# Altium PCB PCB.PcbDoc (part 2 of 2)
Units mm, origin at the board's own origin, x right, y up, seen from the top; angles counter-clockwise.
Board outline 183.5 x 159 mm, 2 copper layers (Top Layer, Bottom Layer); 206 components, 135 nets, 566 pads, 103 vias.
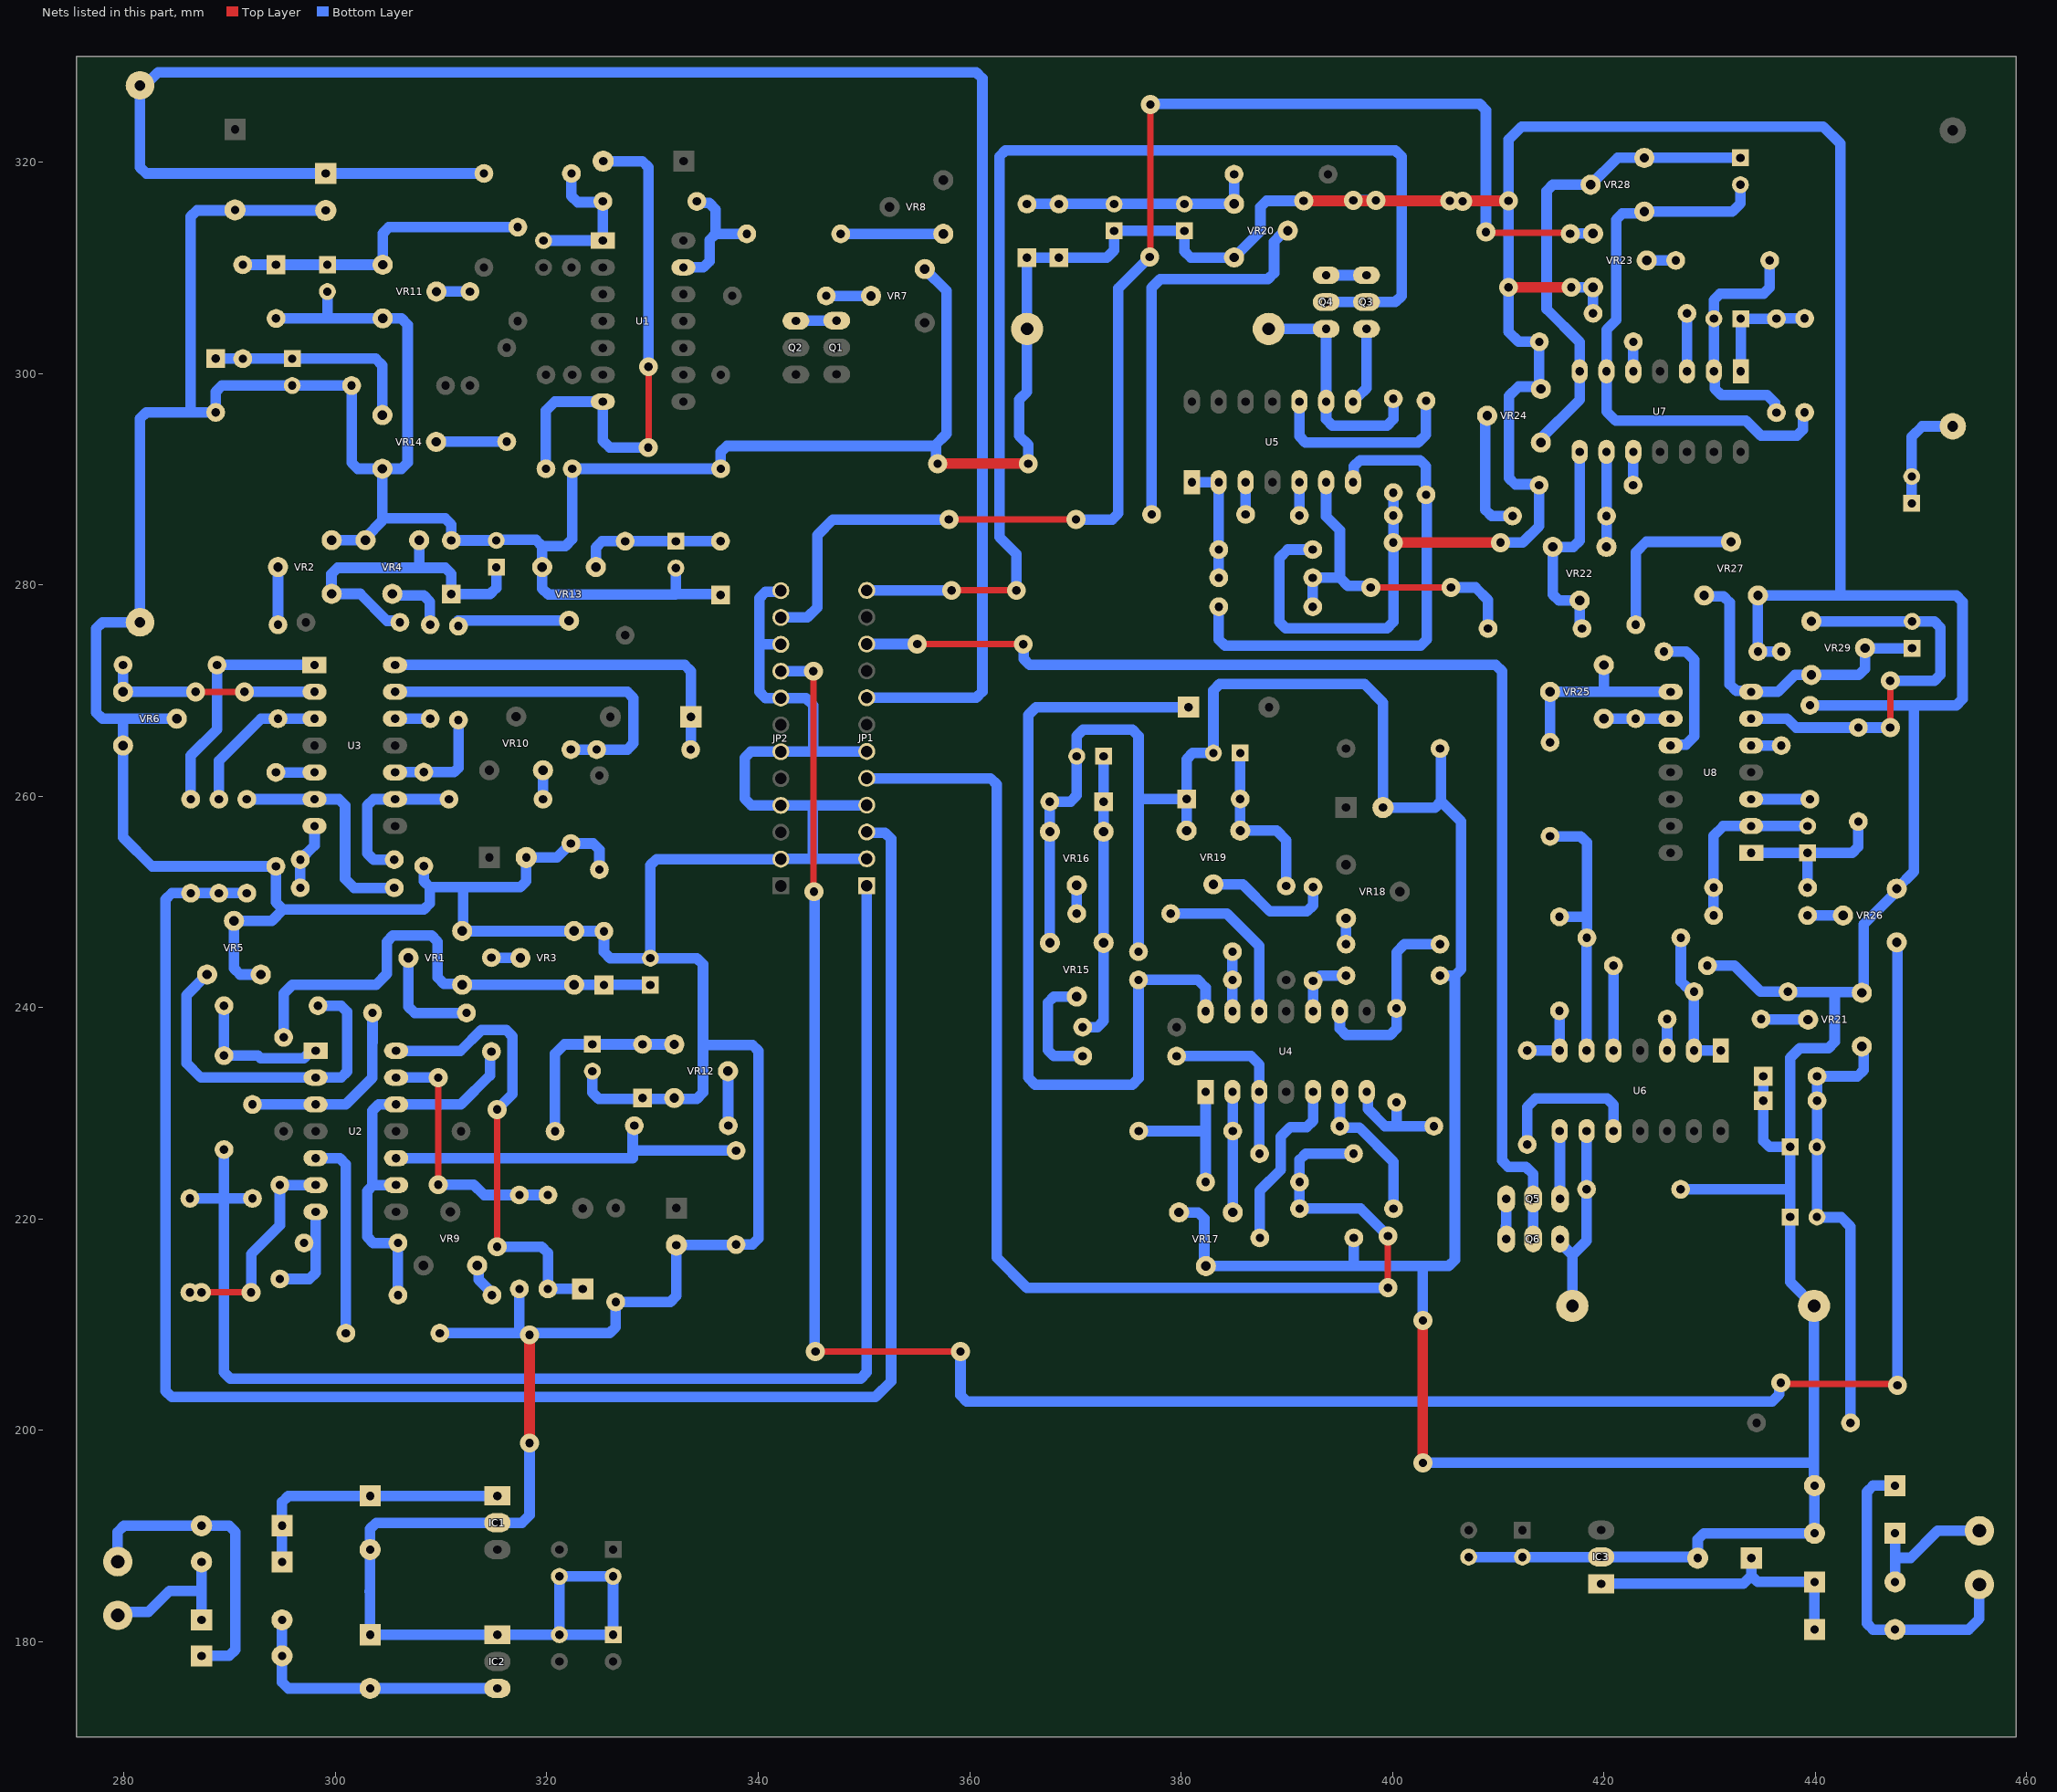
[diagram p2: the nets of this part, all layers, seen from the top]

## Via types
v1: diameter 1.8, hole 0.8, Top Layer to Bottom Layer, 103 vias

## Nets (pads, with @x,y where several pads share a name; then routed paths per layer and width w, separated by ;. In a path a pad name is that pad's centre, name@x,y a point inside that pad or via, vN(x,y) a via of type N, cw(c..) or ccw(c..) an arc to the next point about the centre after c; other vN are vias at no path point) (continued)
GND: C2.2 C3.2 C4.2 C5.2 C6.2 C7.2 C8.2 C9.2 C10.2 C11.2 C12.2 C13.2 C14.1 C15.1 C17.1 C18.1 C20.2 C21.2 C22.2 C23.1 C24.1 C25.1 C27.2 C28.2 C29.2 D1.1 D2.1 D4.1 D5.1 D6.2 D7.2 D8.1 D11.1 D12.2 D14.2 D15.2 D16.2 D17.2 D24.1 D25.1 IC1.2 IC2.1 IC3.2 JP1.2 JP1.4 JP1.6 JP2.2 JP2.4 JP2.6 JP2.8 JP2.10 JP2.12 R14.1 R17.1 R26.1 R27.1 R30.1 R31.1 R32.1 R37.1 R38.1 R39.2 R47.1 R48.1 R61.1 R62.2 R65.1 R68.1 R69.2 R70.1 R73.1 R77.1 R78.1 R80.1 R82.1 R87.2 R88.2 R89.1 R94.1 R96.2 R97.2 R99.1 VR1.3 VR2.3 VR3.3 VR4.3 VR5.2 VR5.3 VR6.2 VR6.3 VR7.3 VR11.3 VR12.3 VR13.3 VR14.3 VR15.3 VR16.3 VR17.2 VR17.3 VR19.3 VR20.3 VR21.3 VR23.3 VR24.3 VR26.3 VR27.3 | length 1328.8
  Top Layer w1: v1(318.365,198.805) v1(318.365,209.041) ; v1(356.973,291.464) v1(365.539,291.464) ; v1(391.593,316.331) v1(410.973,316.331) ; v1(400.076,283.996) v1(410.211,283.996) ; v1(402.87,196.925) v1(402.87,210.387) ; v1(410.973,308.152) v1(416.917,308.152)
  Bottom Layer w1: VR6.2@284.989,267.334 279.909,267.334 ; D4.1@289.993,315.421 286.896,315.421 286.31,314.836 286.31,296.315 ; D4.1@290.546,315.421 C4.2@299.086,315.421 ; VR5.3@292.939,243.128 290.985,243.128 290.399,243.714 VR5.2@290.399,248.208 293.981,248.208 295.047,249.275 ; D5.1@294.387,305.205 299.429,305.205 ; C7.2@299.238,307.745 299.238,305.396 299.429,305.205 ; VR2.3@299.645,284.225 VR4.3@302.845,284.225 302.871,284.25 302.871,284.495 304.445,286.07 304.445,286.277 ; 303.217,184.756 303.281,184.692 ; R27.1@308.357,253.389 308.357,251.969 308.943,251.383 ; R31.1@309.881,209.193 317.247,209.193 ; R47.1@317.404,213.379 317.404,209.35 317.247,209.193 ; v1(318.365,198.805) 318.365,191.972 317.651,191.258 IC1.2@315.32,191.258 303.866,191.258 303.281,190.673 C20.2@303.281,188.718 303.281,184.692 ; C8.2@324.308,233.984 324.308,231.953 324.894,231.368 334.187,231.368 334.773,231.953 334.773,236.473 ; R38.1@324.969,253.059 324.969,254.937 324.383,255.523 R48.1@322.276,255.523 320.955,254.202 C6.2@318.055,254.202 318.055,251.969 317.469,251.383 312.065,251.383 ; C9.2@332.208,281.583 332.208,279.12 ; D7.2@336.424,279.043 336.348,279.12 332.208,279.12 ; JP2.10@342.139,274.37 340.164,274.37 340.107,274.312 ; JP2.12@342.139,279.45 342.024,279.335 340.693,279.335 340.107,278.749 340.107,274.312 ; JP1.2@350.267,254.075 350.254,254.062 345.162,254.062 ; JP1.4@350.267,259.155 350.254,259.142 345.289,259.142 ; JP1.6@350.267,264.235 350.254,264.222 345.212,264.222 ; VR7.3@355.753,309.879 357.806,307.826 357.806,294.278 356.668,293.14 ; v1(356.973,291.464) 356.82,291.617 356.82,292.989 356.668,293.14 ; v1(365.539,291.464) 365.539,293.235 364.677,294.097 364.677,297.512 365.431,298.265 R82.1@365.431,304.215 D14.2@365.431,310.946 D15.2@368.453,310.946 372.975,310.946 373.66,311.632 C15.1@373.66,313.486 C14.1@380.315,313.486 380.315,311.557 380.901,310.971 VR20.3@385.014,310.971 387.503,313.46 387.503,315.745 388.089,316.331 v1(391.593,316.331) ; VR15.3@367.59,246.125 VR16.3@367.59,256.641 D11.1@367.59,259.485 369.544,259.485 370.13,260.071 C11.2@370.13,263.778 370.13,265.707 370.716,266.293 375.386,266.293 375.972,265.707 375.972,259.917 ; R77.1@375.972,245.287 375.972,259.917 ; VR17.3@379.807,220.623 381.604,220.623 382.19,220.038 382.19,215.701 VR17.2@382.347,215.543 396.292,215.543 ; VR19.3@380.518,256.742 D12.2@380.518,259.739 ; R70.1@392.456,283.336 390.094,283.336 389.307,282.549 389.307,276.48 389.893,275.894 399.491,275.894 400.076,276.48 R62.2@400.076,286.562 R73.1@400.076,288.721 ; v1(396.292,316.381) v1(398.425,316.381) ; R65.1@396.343,218.21 396.343,215.594 396.292,215.543 ; v1(402.87,196.925) 439.878,196.925 ; v1(402.87,210.387) 402.87,215.543 ; R61.1@404.496,243.026 R61.1@405.215,243.026 ; R68.1@404.496,264.515 404.598,264.413 404.598,259.512 ; R61.1@405.315,243.026 405.614,243.026 405.901,242.739 405.901,216.129 405.315,215.543 402.87,215.543 ; 405.755,243.026 405.899,243.026 406.485,243.612 406.485,257.625 404.598,259.512 ; C27.2@407.208,187.986 407.221,187.999 412.276,187.999 C29.2@412.288,188.012 412.295,188.018 419.737,188.018 IC3.2@419.743,188.024 428.76,188.024 C28.2@428.875,187.91 428.875,189.678 429.46,190.264 D24.1@439.924,190.264 D25.1@439.924,194.768 ; v1(410.211,283.996) 412.319,283.996 413.869,285.546 R94.1@413.869,289.432 413.791,289.51 411.61,289.51 411.024,290.095 411.024,297.865 411.913,298.754 413.869,298.754 413.881,298.766 413.881,302.983 R87.2@413.894,302.996 411.913,302.996 410.973,303.935 v1(410.973,308.152) 410.973,322.122 412.218,323.366 440.742,323.366 442.367,321.741 442.367,278.991 ; v1(416.917,308.152) VR23.3@418.974,308.152 R88.2@418.974,305.688 ; R80.1@427.254,222.806 437.541,222.806 437.618,222.73 ; R69.2@429.794,243.964 432.36,243.964 434.824,241.501 R78.1@437.414,241.501 437.465,241.45 441.834,241.45 ; VR27.3@434.57,278.991 R99.1@434.57,273.682 R96.2@436.779,273.682 ; D16.2@435.078,233.5 D17.2@435.078,231.188 435.078,227.405 435.663,226.819 C17.1@437.618,226.819 ; VR27.3@435.155,278.991 442.367,278.991 ; R97.2@439.497,268.602 449.327,268.602 ; D25.1@439.878,194.814 439.878,196.925 ; 279.909,267.334 277.955,267.334 277.369,267.92 277.369,275.867 277.955,276.453 R14.1@281.509,276.453 281.509,295.73 282.095,296.315 286.31,296.315 ; 279.909,267.334 VR6.3@279.909,264.794 279.909,256.107 282.652,253.364 R32.1@294.362,253.364 294.362,249.96 295.047,249.275 ; 286.31,296.315 D8.1@288.672,296.315 288.672,298.27 289.258,298.855 C10.2@295.911,298.855 R39.2@301.524,298.855 301.524,291.567 302.11,290.981 VR14.3@304.445,290.981 ; 295.047,249.275 308.357,249.275 308.943,249.86 308.943,251.383 ; 299.429,305.205 VR11.3@304.471,305.205 306.247,305.205 306.833,304.62 306.833,291.567 306.247,290.981 VR14.3@304.445,290.981 ; 303.281,184.692 C24.1@303.281,180.667 IC2.1@315.32,180.667 C23.1@321.188,180.667 ; 304.445,286.277 VR14.3@304.445,290.981 ; 304.445,286.277 310.387,286.277 310.973,285.692 D2.1@310.973,284.2 C3.2@315.215,284.2 315.266,284.25 318.973,284.25 319.558,283.665 ; 308.943,251.383 312.065,251.383 ; 312.065,251.383 312.065,247.319 VR1.3@311.989,247.243 312.002,247.23 325.388,247.23 D1.1@325.4,247.217 325.4,245.263 325.986,244.677 C2.2@329.795,244.677 ; 317.247,209.193 325.932,209.193 326.518,209.779 R37.1@326.518,212.14 331.673,212.14 332.258,212.726 C5.2@332.258,217.53 332.281,217.553 337.874,217.553 R26.1@337.897,217.575 339.445,217.575 340.031,218.161 340.031,235.887 339.445,236.473 334.773,236.473 ; 319.558,283.665 321.741,283.665 322.403,284.327 R17.1@322.403,290.981 R30.1@336.449,290.981 336.449,292.555 337.035,293.14 356.668,293.14 ; 319.558,283.665 VR13.3@319.558,281.685 319.558,279.655 320.144,279.069 332.157,279.069 332.208,279.12 ; C23.1@321.188,180.667 C25.1@326.268,180.667 C21.2@326.268,186.178 C22.2@321.188,186.178 C23.1@321.188,180.667 ; C2.2@329.795,244.677 334.187,244.677 334.773,244.091 334.773,236.473 ; C2.2@329.795,244.677 329.795,253.464 330.38,254.05 JP2.2@342.139,254.05 342.152,254.062 345.162,254.062 ; 340.107,274.312 340.107,269.876 340.693,269.29 JP2.8@342.139,269.29 344.527,269.29 345.212,268.604 345.212,264.222 ; 345.162,254.062 345.162,259.015 345.289,259.142 ; 345.212,264.222 342.152,264.222 JP2.6@342.139,264.21 339.296,264.21 338.71,263.624 338.71,259.765 339.345,259.13 JP2.4@342.139,259.13 342.152,259.142 345.289,259.142 ; 375.972,259.917 376.15,259.739 D12.2@380.518,259.739 ; D12.2@380.518,259.739 380.518,263.497 381.104,264.083 C13.2@383.058,264.083 383.058,270.025 383.644,270.611 397.352,270.611 399.106,268.856 C12.2@399.106,258.927 404.012,258.927 404.598,259.512 ; 396.292,215.543 402.87,215.543 ; 437.618,222.73 C18.1@437.618,220.19 437.618,214.043 R89.1@439.878,211.783 439.878,196.925 ; 437.618,222.73 C17.1@437.618,226.819 ; C17.1@437.618,226.819 437.618,235.252 438.532,236.167 441.248,236.167 441.834,236.752 441.834,241.45 ; 441.834,241.45 444.349,241.45 VR21.3@444.399,241.399 444.573,241.572 444.573,247.88 447.701,251.009 VR26.3@447.701,251.254 449.327,252.88 449.327,268.602 ; 442.367,278.991 453.339,278.991 453.924,278.405 453.924,269.188 453.339,268.602 449.327,268.602
  other v1: 406.63,316.28 405.436,316.331
h13: R8.2 R25.2 U1.13 | length 12.9
  Bottom Layer w1: U1.13@332.919,310.031 334.797,310.031 335.383,310.617 335.383,311.8 335.383,312.621 335.968,313.206 ; R8.2@334.189,316.28 334.338,316.131 335.347,316.131 335.968,315.509 335.968,313.206 ; R25.2@338.913,313.206 337.812,313.206 335.968,313.206
IPl: JP1.10 Q5.2 Q6.2 | length 117.9
  Top Layer w0.6: v1(355.041,274.395) 355.053,274.382 365.063,274.382 v1(365.075,274.37)
  Bottom Layer w1: JP1.10@350.267,274.395 v1(355.041,274.395) ; v1(365.075,274.37) 365.099,274.346 365.099,273 365.685,272.414 409.778,272.414 410.363,271.828 410.363,225.522 410.949,224.936 412.629,224.936 413.31,224.256 Q5.2@413.31,221.893 Q6.2@413.31,218.109
IPr: JP1.12 Q3.2 Q4.2 | length 115
  Top Layer w0.6: v1(358.293,279.475) v1(364.415,279.475)
  Bottom Layer w1: JP1.12@350.267,279.475 v1(358.293,279.475) ; v1(364.415,279.475) 364.415,282.904 362.807,284.512 362.807,320.52 363.393,321.106 400.278,321.106 400.864,320.52 400.864,307.341 400.278,306.755 Q4.2@393.726,306.755
KL-76: C4.1 JP1.8 R11.1 R14.2 | length 190.2
  Bottom Layer w1: R11.1@314.047,318.921 282.095,318.921 281.509,319.507 R14.2@281.509,327.253 281.969,327.253 283.214,328.497 360.621,328.497 361.207,327.911 361.207,269.901 360.621,269.315 JP1.8@350.267,269.315
NetC1_1: C1.1 R3.2 R8.1 U1.1 | length 14.7
  Bottom Layer w1: C1.1@319.685,312.571 U1.1@325.299,312.571 R8.1@325.299,316.28 325.223,316.204 322.913,316.204 322.327,316.789 R3.2@322.327,318.921
NetC2_1: C2.1 D1.2 R4.1 VR1.1 VR3.1 | length 46.8
  Bottom Layer w1: R4.1@295.098,237.184 295.098,241.348 295.92,242.17 303.853,242.17 304.877,243.194 304.877,243.832 304.857,243.852 304.857,246.225 305.442,246.811 309.092,246.811 309.678,246.225 309.678,242.839 310.264,242.253 311.899,242.253 VR1.1@311.989,242.163 312.002,242.15 329.782,242.15 C2.1@329.795,242.137
NetC3_1: C3.1 D2.2 R5.1 VR2.1 VR4.1 | length 32.3
  Bottom Layer w1: R5.1@306.096,276.453 305.948,276.601 304.881,276.601 302.337,279.145 VR2.1@299.645,279.145 299.619,279.17 299.619,281.023 300.205,281.609 307.925,281.609 ; VR4.1@307.925,284.225 307.925,281.609 ; C3.1@315.215,281.66 315.215,279.705 314.629,279.12 D2.2@310.973,279.12 310.973,281.023 310.387,281.609 307.925,281.609
NetC7_1: C7.1 D5.2 R29.1 R40.2 VR11.1 | length 29.2
  Bottom Layer w1: R40.2@291.237,310.285 D5.2@294.387,310.285 C7.1@299.238,310.285 VR11.1@304.471,310.285 304.471,313.256 305.057,313.841 R29.1@317.247,313.841
NetC8_1: C8.1 D6.1 R35.2 VR12.1 | length 19
  Bottom Layer w1: R35.2@320.778,228.294 320.778,235.633 321.668,236.524 C8.1@324.308,236.524 D6.1@329.058,236.524 VR12.1@332.055,236.524
NetC9_1: C9.1 D7.1 R36.2 VR13.1 | length 13.9
  Bottom Layer w1: VR13.1@324.638,281.685 324.638,283.538 325.224,284.123 R36.2@327.407,284.123 C9.1@332.208,284.123 D7.1@336.424,284.123
NetC10_1: C10.1 D8.2 R40.1 VR14.1 | length 20.7
  Bottom Layer w1: D8.2@288.672,301.395 R40.1@291.237,301.395 C10.1@295.911,301.395 303.81,301.395 304.445,300.76 VR14.1@304.445,296.061
NetC11_1: C11.1 D11.2 R51.1 VR15.1 VR16.1 | length 27.3
  Bottom Layer w1: R51.1@370.689,238.149 372.084,238.149 372.67,238.735 VR15.1@372.67,246.125 VR16.1@372.67,256.641 D11.2@372.67,259.485 C11.1@372.67,263.778
NetC13_1: C13.1 D12.1 R67.2 VR19.1 | length 16.4
  Bottom Layer w1: C13.1@385.598,264.083 D12.1@385.598,259.739 VR19.1@385.598,256.742 389.027,256.742 389.942,255.828 R67.2@389.942,251.51
NetC14_2: C14.2 C15.2 D14.1 D15.1 R76.1 VR20.1 | length 22.4
  Bottom Layer w1: D14.1@365.431,316.026 365.444,316.038 385.002,316.038 VR20.1@385.014,316.051 R76.1@385.014,318.845
NetC16_1: C16.1 R84.2 R86.2 U7.1 | length 11
  Bottom Layer w1: U7.1@432.944,300.202 C16.1@432.944,305.18 R84.2@436.322,305.18 436.335,305.193 438.977,305.193 R86.2@438.989,305.205
NetC16_2: C16.2 R84.1 R92.2 U7.2 | length 24
  Bottom Layer w1: R92.2@435.687,310.692 435.687,308.128 435.101,307.542 430.99,307.542 430.404,306.956 U7.2@430.404,300.202 430.504,300.101 430.504,298.544 431.09,297.959 435.441,297.959 436.173,297.226 436.173,296.439 R84.1@436.322,296.29
NetC17_2: C17.2 C18.2 D16.1 D17.1 R81.1 VR21.1 | length 42.4
  Bottom Layer w1: R81.1@443.333,200.71 443.333,219.277 442.458,220.152 440.195,220.152 C18.2@440.158,220.19 C17.2@440.158,226.819 D17.1@440.158,231.188 D16.1@440.158,233.5 443.987,233.5 444.573,234.085 444.573,236.146 VR21.1@444.399,236.319
NetC19_1: C19.1 R91.2 R93.2 U8.1 | length 16
  Bottom Layer w1: U8.1@433.935,254.632 C19.1@439.269,254.632 ; R91.2@439.269,251.356 C19.1@439.269,254.632 ; R93.2@444.069,257.604 444.069,255.218 443.483,254.632 C19.1@439.269,254.632
NetC19_2: C19.2 R91.1 R98.2 U8.2 | length 16.8
  Bottom Layer w1: R98.2@430.379,248.714 430.379,256.259 431.292,257.172 C19.2@439.269,257.172
NetC20_1: C20.1 D18.2 D19.2 IC1.1 | length 26.3
  Bottom Layer w1: D18.2@294.949,187.55 D19.2@294.949,190.979 294.949,193.213 295.535,193.798 C20.1@303.281,193.798 IC1.1@315.32,193.798
NetC24_2: C24.2 D20.1 D21.1 IC2.3 | length 26.5
  Bottom Layer w1: D20.1@294.949,182.064 D21.1@294.949,178.66 294.949,176.172 295.535,175.587 C24.2@303.281,175.587 IC2.3@315.32,175.587
NetC26_1: C26.1 U7.7 VR24.1 VR28.2 VR28.3 | length 46.1
  Bottom Layer w1: VR24.1@413.869,293.674 417.704,297.509 U7.7@417.704,300.202 417.704,302.97 414.58,306.094 414.58,317.269 415.166,317.855 VR28.2@418.745,317.855 421.285,320.395 C26.1@432.919,320.395
NetC26_2: C26.2 R86.1 U7.6 VR28.1 | length 54.2
  Bottom Layer w1: C26.2@432.919,317.855 432.919,316.078 432.155,315.315 VR28.1@423.825,315.315 423.652,315.141 421.747,315.141 421.161,314.556 421.161,305.063 420.244,304.145 U7.6@420.244,300.202 420.244,296.392 421.108,295.528 433.427,295.528 434.849,294.106 438.255,294.106 438.84,294.691 438.84,296.167 R86.1@438.989,296.315
NetC28_1: C28.1 D22.2 D23.2 IC3.1 | length 26.9
  Bottom Layer w1: IC3.1@419.743,185.484 433.195,185.484 433.955,186.244 ; C28.1@433.955,187.91 433.955,186.244 ; D23.2@439.924,181.154 D22.2@439.924,185.658 434.54,185.658 433.955,186.244
NetC30_1: C30.1 U8.7 VR27.1 VR29.2 VR29.3 | length 30.9
  Bottom Layer w1: VR27.1@429.49,278.991 429.562,278.919 431.317,278.919 431.903,278.333 431.903,270.592 432.522,269.973 433.834,269.973 U8.7@433.935,269.872 436.475,269.872 438.075,271.473 VR29.3@439.624,271.473 444.118,271.473 444.704,272.058 VR29.2@444.704,274.013 444.717,274 C30.1@449.162,274 C30.1@449.175,273.987
NetC30_2: C30.2 R93.1 U8.6 VR29.1 | length 39.8
  Top Layer w0.6: v1(447.089,266.494) v1(447.089,270.914)
  Bottom Layer w1: U8.6@433.935,267.332 437.338,267.332 438.176,266.494 R93.1@444.069,266.494 v1(447.089,266.494) ; VR29.1@439.624,276.553 439.631,276.546 449.156,276.546 C30.2@449.162,276.54 451.256,276.54 451.842,275.954 451.842,271.5 451.256,270.914 v1(447.089,270.914)
NetD3_1: D3.1 R24.1 U1.7 | length 50.8
  Top Layer w0.6: v1@329.617,292.759 v1(329.617,300.63)
  Bottom Layer w1: R24.1@319.914,290.981 319.914,296.493 320.752,297.331 U1.7@325.299,297.331 325.299,293.648 325.959,292.988 v1(329.591,292.988) ; D3.1@325.328,320.085 329.031,320.085 329.617,319.499 v1(329.617,300.63)
NetD18_1: D18.1 D20.2 HD1.2 | length 14.4
  Bottom Layer w1: HD1.2@279.405,182.495 279.736,182.827 282.302,182.827 284.294,184.819 287.317,184.819 287.329,184.807 ; D20.2@287.329,182.064 287.329,184.807 ; D18.1@287.329,187.55 287.329,184.807
NetD19_1: D19.1 D21.2 HD1.1 | length 29
  Bottom Layer w1: HD1.1@279.405,187.575 279.405,190.393 279.99,190.979 D19.1@287.329,190.979 289.944,190.979 290.53,190.393 290.53,179.246 289.944,178.66 D21.2@287.329,178.66
NetD22_1: D22.1 D24.2 HD2.2 | length 13.6
  Bottom Layer w1: D22.1@447.544,185.658 447.544,187.936 ; D24.2@447.544,190.264 447.544,187.936 ; HD2.2@455.519,190.501 451.582,190.501 449.017,187.936 447.544,187.936
NetD23_1: D23.1 D25.2 HD2.1 | length 29.9
  Bottom Layer w1: D25.2@447.544,194.768 445.462,194.768 444.877,194.182 444.877,181.74 445.462,181.154 454.503,181.154 455.519,182.17 HD2.1@455.519,185.421
NetQ1_1: Q1.1 Q2.3 | length 3.9
  Bottom Layer w1: Q2.3@343.561,304.977 343.574,304.989 347.41,304.989 Q1.1@347.422,305.002
NetQ3_1: Q3.1 Q4.3 | length 3.8
  Bottom Layer w1: Q4.3@393.726,309.295 Q3.1@397.536,309.295
NetQ5_1: Q5.1 Q6.3 | length 3.8
  Bottom Layer w1: Q6.3@410.721,219.29 Q6.3@410.732,219.3 ; Q6.3@410.77,218.109 Q5.1@410.77,221.893
NetR6_1: R6.1 R20.1 U2.6 | length 20.5
  Top Layer w0.6: R20.1@286.234,213.054 v1(292.025,213.054)
  Bottom Layer w1: v1(292.025,213.054) 292.025,216.67 294.743,219.388 R6.1@294.743,223.214 U2.6@298.121,223.214
  other v1: 287.326,213.054
NetR6_2: R6.2 R22.2 U2.7 | length 10.5
  Bottom Layer w1: R6.2@294.743,214.324 297.535,214.324 298.121,214.91 298.121,217.792 ; R22.2@297.029,217.728 297.093,217.792 298.121,217.792 ; U2.7@298.121,220.674 298.121,217.792
NetR7_1: R7.1 R21.1 U3.6 | length 21.5
  Bottom Layer w1: R21.1@291.618,259.714 U3.6@298.019,259.714 300.329,259.714 300.915,259.128 300.915,252.172 301.755,251.332 305.512,251.332 305.538,251.357 R7.1@305.563,251.332
NetR7_2: R7.2 R23.2 U3.7 | length 6.4
  Bottom Layer w1: R7.2@296.673,251.332 R23.2@296.673,253.999 298.019,255.345 U3.7@298.019,257.174
NetR9_1: R9.1 VR1.2 | length 10.4
  Bottom Layer w1: VR1.2@306.909,244.703 306.909,240.081 307.495,239.496 R9.1@312.396,239.496
NetR10_1: R10.1 VR2.2 | length 5.5
  Bottom Layer w1: VR2.2@294.552,281.672 VR2.2@294.565,281.685 R10.1@294.565,276.224
NetR12_1: R12.1 R15.2 U2.1 | length 13.8
  Bottom Layer w1: R15.2@289.459,240.181 R12.1@289.459,235.457 292.665,235.457 292.927,235.195 297.021,235.195 297.74,235.914 U2.1@298.121,235.914
NetR13_1: R13.1 R16.2 U3.1 | length 23
  Bottom Layer w1: R13.1@286.31,259.714 286.31,263.829 288.799,266.318 R16.2@288.799,272.414 U3.1@298.019,272.414
NetR15_1: R15.1 U2.2 VR5.1 | length 33.9
  Bottom Layer w1: VR5.1@287.859,243.128 285.903,241.172 285.903,234.746 287.275,233.374 U2.2@298.121,233.374 300.532,233.374 301.118,233.96 301.118,239.596 300.532,240.181 R15.1@298.349,240.181
NetR16_1: R16.1 U3.2 VR6.1 | length 20.7
  Top Layer w0.6: v1(286.767,269.874) v1(291.39,269.874)
  Bottom Layer w1: R16.1@279.909,272.414 VR6.1@279.909,269.874 v1(286.767,269.874) ; v1(291.39,269.874) U3.2@298.019,269.874
NetR18_2: R18.2 VR3.2 | length 2.8
  Bottom Layer w1: R18.2@314.758,244.728 314.771,244.715 317.488,244.715 VR3.2@317.501,244.703
NetR19_2: R19.2 VR4.2 | length 5.5
  Bottom Layer w1: VR4.2@305.385,279.145 305.548,278.982 308.355,278.982 308.941,278.397 R19.2@308.941,276.732
NetR25_1: R25.1 VR8.1 | length 9.7
  Bottom Layer w1: R25.1@347.803,313.206 VR8.1@357.506,313.206
NetR28_2: R28.2 VR7.2 | length 4.2
  Bottom Layer w1: R28.2@346.432,307.339 VR7.2@350.673,307.339
NetR31_2: R31.2 U2.5 | length 19.1
  Bottom Layer w1: U2.5@298.121,225.754 300.405,225.754 300.991,225.168 R31.2@300.991,209.193
NetR32_2: R32.2 U3.5 | length 3.7
  Bottom Layer w1: R32.2@294.362,262.254 U3.5@298.019,262.254
NetR33_2: R33.2 VR9.3 | length 3.4
  Bottom Layer w1: VR9.3@313.412,215.594 313.553,215.453 313.553,214.267 314.809,213.011 R33.2@314.809,212.8
NetR34_2: R34.2 VR10.3 | length 2.7
  Bottom Layer w1: R34.2@319.635,259.714 VR10.3@319.635,262.457
NetR41_1: R41.1 VR11.2 | length 3.2
  Bottom Layer w1: VR11.2@309.551,307.745 R41.1@312.726,307.745
NetR42_1: R42.1 VR12.2 | length 5.2
  Bottom Layer w1: VR12.2@337.135,233.984 337.148,233.971 337.148,228.84 R42.1@337.161,228.828
NetR43_1: R43.1 VR13.2 | length 10.5
  Bottom Layer w1: R43.1@311.608,276.605 VR13.2@322.098,276.605
NetR49_2: R49.2 VR14.2 | length 6.7
  Bottom Layer w1: VR14.2@309.525,293.521 309.538,293.534 316.193,293.534 R49.2@316.206,293.547
NetR52_1: R52.1 R58.1 U4.6 | length 14.2
  Bottom Layer w1: U4.6@395.022,232.028 R52.1@395.022,228.777 395.171,228.628 396.872,228.628 400.102,225.399 R58.1@400.102,220.979
NetR52_2: R52.2 R59.2 U4.7 | length 10.9
  Bottom Layer w1: U4.7@397.562,232.028 397.662,231.928 397.662,230.404 399.289,228.777 400.457,228.777 ; R59.2@400.381,231.037 400.381,228.853 400.457,228.777 ; R52.2@403.912,228.777 400.457,228.777
NetR53_1: R53.1 VR15.2 | length 11
  Bottom Layer w1: VR15.2@370.13,241.045 367.972,241.045 367.386,240.459 367.386,235.992 367.972,235.406 R53.1@370.689,235.406
NetR54_1: R54.1 R55.2 U4.1 | length 14.9
  Bottom Layer w1: R55.2@375.997,228.32 382.246,228.32 382.322,228.396 ; R54.1@382.322,223.494 382.322,228.396 ; U4.1@382.322,232.028 382.322,228.396
NetR55_1: R55.1 U4.2 VR17.1 | length 11.4
  Bottom Layer w1: U4.2@384.862,232.028 384.875,232.015 384.875,228.332 R55.1@384.887,228.32 VR17.1@384.887,220.623
NetR56_2: R56.2 R64.1 U5.7 | length 48.5
  Bottom Layer w1: R56.2@383.566,277.926 383.566,274.829 384.152,274.243 402.666,274.243 403.251,274.829 403.251,288.441 R64.1@403.175,288.518 403.175,291.208 402.589,291.794 396.935,291.794 396.349,291.208 396.349,289.794 U5.7@396.266,289.711
NetR57_2: R57.2 VR16.2 | length 2.7
  Bottom Layer w1: R57.2@370.13,248.894 VR16.2@370.13,251.561
NetR60_2: R60.2 R75.1 U6.7 | length 6.8
  Bottom Layer w1: R75.1@412.752,235.939 U6.7@415.824,235.938 415.812,235.951 415.812,239.686 R60.2@415.799,239.699
NetR62_1: R62.1 U5.5 | length 3.1
  Bottom Layer w1: R62.1@391.186,286.562 U5.5@391.186,289.711
NetR63_1: R63.1 R70.2 U5.1 U5.2 | length 11.6
  Bottom Layer w1: U5.1@381.026,289.711 U5.2@383.566,289.711 R70.2@383.566,283.336 R63.1@383.566,280.669
NetR64_2: R64.2 U5.10 | length 19
  Bottom Layer w1: U5.10@391.186,297.331 391.186,294.056 391.772,293.471 402.439,293.471 403.175,294.207 R64.2@403.175,297.408
NetR65_2: R65.2 U4.5 | length 16.8
  Bottom Layer w1: R65.2@387.453,218.21 387.453,222.681 389.416,224.644 389.416,227.794 390.323,228.701 391.896,228.701 392.482,229.286 U4.5@392.482,232.028
NetR66_2: R66.2 VR18.3 | length 2.4
  Bottom Layer w1: R66.2@395.606,245.998 VR18.3@395.606,248.436
NetR69_1: R69.1 U6.5 | length 8
  Bottom Layer w1: U6.5@420.904,235.938 R69.1@420.904,243.964
NetR71_1: R71.1 VR19.2 | length 12.5
  Bottom Layer w1: VR19.2@383.058,251.662 385.852,251.662 388.418,249.097 391.896,249.097 392.482,249.683 R71.1@392.482,251.408
NetR72_1: R72.1 R78.2 U6.1 U6.2 | length 13.9
  Bottom Layer w1: R72.1@427.28,246.606 427.28,242.475 427.866,241.89 427.925,241.89 428.314,241.501 R78.2@428.524,241.501 U6.2@428.524,235.938 U6.1@431.064,235.938
NetR75_2: R75.2 U6.10 | length 14.8
  Bottom Layer w1: R75.2@412.751,227.05 412.751,230.602 413.54,231.391 420.319,231.391 420.904,230.806 U6.10@420.904,228.318
NetR79_1: R79.1 VR20.2 | length 38.3
  Bottom Layer w1: R79.1@377.216,286.663 377.216,308.099 378.036,308.919 388.213,308.919 388.799,309.504 388.799,312.473 389.385,313.059 389.397,313.059 389.849,313.511 VR20.2@390.094,313.511
NetR83_1: R83.1 U7.8 VR22.2 VR22.3 | length 21.1
  Bottom Layer w1: R83.1@417.704,275.868 VR22.2@417.704,278.51 415.75,278.51 415.164,279.096 VR22.3@415.164,283.59 417.118,283.59 417.704,284.176 U7.8@417.704,292.582
NetR85_1: R85.1 VR21.2 | length 4.5
  Bottom Layer w1: R85.1@434.874,238.91 434.9,238.884 439.294,238.884 VR21.2@439.319,238.859
NetR87_1: R87.1 U7.5 | length 2.8
  Bottom Layer w1: U7.5@422.784,300.202 R87.1@422.784,302.996
NetR88_1: R88.1 U7.3 | length 5.5
  Bottom Layer w1: U7.3@427.864,300.202 R88.1@427.864,305.688
NetR90_1: R90.1 U8.8 VR25.2 VR25.3 | length 18.7
  Bottom Layer w1: R90.1@414.91,265.097 VR25.2@414.91,269.872 419.99,269.872 ; VR25.3@419.99,272.412 419.99,269.872 ; U8.8@426.315,269.872 419.99,269.872
NetR92_1: R92.1 VR23.2 | length 2.7
  Bottom Layer w1: VR23.2@424.054,310.692 R92.1@426.797,310.692
NetR94_2: R94.2 U7.10 | length 3.2
  Bottom Layer w1: R94.2@422.759,289.432 422.771,289.445 422.771,292.569 U7.10@422.784,292.582
NetR95_1: R95.1 U7.9 VR22.1 | length 9
  Bottom Layer w1: VR22.1@420.244,283.59 R95.1@420.244,286.511 U7.9@420.244,292.582
NetR95_2: R95.2 VR24.2 | length 11.9
  Bottom Layer w1: VR24.2@408.789,296.214 408.789,287.097 409.374,286.511 R95.2@411.354,286.511
NetR96_1: R96.1 U8.5 | length 2.8
  Bottom Layer w1: U8.5@433.935,264.792 R96.1@436.779,264.792
NetR97_1: R97.1 U8.3 | length 5.6
  Bottom Layer w1: U8.3@433.935,259.712 R97.1@439.497,259.712
NetR98_1: R98.1 VR26.2 | length 3.4
  Bottom Layer w1: R98.1@439.269,248.714 VR26.2@442.621,248.714
NetR99_2: R99.2 U8.10 | length 13
  Bottom Layer w1: R99.2@425.68,273.682 427.786,273.682 428.558,272.911 428.558,265.672 427.778,264.893 426.415,264.893 U8.10@426.315,264.792
NetR100_1: R100.1 U8.9 VR25.1 | length 6.3
  Bottom Layer w1: VR25.1@419.99,267.332 R100.1@423.013,267.332 U8.9@426.315,267.332
NetR100_2: R100.2 VR27.2 | length 16.3
  Bottom Layer w1: R100.2@423.013,276.222 423.013,283.08 424.003,284.071 VR27.2@432.03,284.071
PWM3: JP2.9 VR26.1 | length 217.6
  Top Layer w0.6: v1(345.212,271.83) 345.241,271.801 345.241,251.002 v1(345.27,250.974) ; v1(345.409,207.466) v1(359.132,207.466) ; v1(436.733,204.494) 436.847,204.38 447.663,204.38 v1(447.778,204.266)
  Bottom Layer w1: JP2.9@342.139,271.83 v1(345.212,271.83) ; v1(345.27,250.974) 345.339,250.904 345.339,207.536 v1(345.409,207.466) ; v1(359.132,207.466) 359.132,203.328 359.717,202.742 435.92,202.742 436.58,203.402 436.58,204.341 v1(436.733,204.494) ; VR26.1@447.701,246.174 447.778,246.098 v1(447.778,204.266)
PWM5: JP2.11 VR23.1 | length 133.7
  Top Layer w0.6: v1(358.039,286.181) v1(370.054,286.181) ; v1(377.039,311.022) 377.089,311.073 v1(377.089,325.449) ; v1(408.839,313.384) 408.916,313.308 416.739,313.308 v1(416.815,313.232)
  Bottom Layer w1: JP2.11@342.139,276.91 344.652,276.91 345.593,277.851 345.593,284.708 347.067,286.181 v1(358.039,286.181) ; v1(370.054,286.181) 373.481,286.181 374.067,286.767 374.067,308.05 v1(377.039,311.022) ; v1(377.089,325.449) 377.14,325.5 408.254,325.5 408.839,324.914 v1(408.839,313.384) ; v1(416.815,313.232) VR23.1@418.974,313.232
r3a: R1.2 R9.2 U2.3 | length 18.5
  Bottom Layer w1: R1.2@292.152,230.834 U2.3@298.121,230.834 300.991,230.834 303.498,233.341 303.498,236.685 303.506,236.693 R9.2@303.506,239.496
r3b: R2.2 R10.2 U3.3 | length 14.3
  Bottom Layer w1: R2.2@288.977,259.714 288.977,263.346 292.965,267.334 U3.3@298.019,267.334
r3c: R50.2 R53.2 U4.3 | length 16.6
  Bottom Layer w1: R53.2@379.579,235.406 386.614,235.406 387.402,234.619 U4.3@387.402,232.028 387.415,232.015 387.415,226.199 R50.2@387.427,226.186
r9a: R18.1 R22.1 R33.1 U2.9 U2.12 | length 37.3
  Bottom Layer w1: U2.9@305.741,223.214 303.583,223.214 ; R33.1@305.919,212.8 R22.1@305.919,217.728 303.583,217.728 302.998,218.314 302.998,222.628 303.583,223.214 ; R18.1@314.758,235.838 314.609,235.689 314.609,233.581 311.862,230.834 U2.12@305.741,230.834 304.084,230.834 303.498,230.248 303.498,223.3 303.583,223.214
r9b: R23.1 R34.1 U3.9 | length 15.3
  Bottom Layer w1: R23.1@305.563,253.999 303.609,253.999 303.023,254.585 303.023,259.128 303.609,259.714 R34.1@310.745,259.714
r9c: R59.1 R66.1 U4.9 | length 19.2
  Bottom Layer w1: U4.9@395.022,239.648 395.022,237.999 395.615,237.405 399.788,237.405 400.381,237.999 R59.1@400.381,239.927 400.381,245.236 401.143,245.998 R66.1@404.496,245.998
r10a: R26.2 R42.2 U2.10 | length 35.3
  Bottom Layer w1: U2.10@305.741,225.754 328.122,225.754 328.122,226.465 ; R42.2@328.271,228.828 328.122,228.679 328.122,226.465 ; R26.2@337.897,226.465 328.122,226.465
r10b: R27.2 R43.2 U3.10 | length 10.7
  Bottom Layer w1: U3.10@305.639,262.254 305.652,262.267 308.344,262.267 R27.2@308.357,262.279 311.226,262.279 311.634,262.687 R43.2@311.634,267.207
r10c: R61.2 R71.2 U4.10 | length 6.2
  Bottom Layer w1: U4.10@392.482,239.648 R71.2@392.482,242.518 392.692,242.518 393.2,243.026 R61.2@395.606,243.026
r12b: R19.1 U3.12 | length 3.3
  Bottom Layer w1: U3.12@305.639,267.334 R19.1@308.967,267.334
r12c: R57.1 U4.12 | length 15.8
  Bottom Layer w1: R57.1@379.02,248.894 384.328,248.894 387.402,245.82 U4.12@387.402,239.648
r13a: R44.2 R47.2 U2.13 | length 24.9
  Top Layer w0.6: v1(309.729,223.24) v1(309.729,233.374)
  Bottom Layer w1: U2.13@305.741,233.374 v1(309.729,233.374) ; v1(309.729,223.24) 313.084,223.24 314.054,222.269 R47.2@317.404,222.269 R44.2@320.096,222.269
r13b: R45.2 R48.2 U3.13 | length 33.2
  Bottom Layer w1: U3.13@305.639,269.874 327.609,269.874 328.194,269.288 328.194,264.999 327.609,264.413 R48.2@322.276,264.413
r13c: R74.2 R77.2 U4.13 | length 5.6
  Bottom Layer w1: U4.13@384.862,239.648 R74.2@384.862,242.62 R77.2@384.862,245.287
r14a: D9.2 R44.1 U2.14 | length 44.3
  Top Layer w0.6: v1(315.291,217.372) v1(315.291,230.357)
  Bottom Layer w1: U2.14@305.741,235.914 311.837,235.914 313.793,237.87 316.161,237.87 316.747,237.284 316.747,231.813 v1(315.291,230.357) ; v1(315.291,217.372) 319.511,217.372 320.096,216.786 R44.1@320.096,213.379 D9.2@323.398,213.379
r14b: D10.2 R45.1 U3.14 | length 35.7
  Bottom Layer w1: U3.14@305.639,272.414 333.044,272.414 333.63,271.828 D10.2@333.63,267.512 333.617,267.499 333.617,264.426 R45.1@333.605,264.413
r14c: D13.2 R74.1 U4.14 | length 78.9
  Bottom Layer w1: D13.2@380.696,268.426 366.269,268.426 365.532,267.69 365.532,233.376 366.194,232.714 375.386,232.714 375.972,233.3 R74.1@375.972,242.62 381.585,242.62 382.322,241.883 U4.14@382.322,239.648
Tc: JP1.3 R2.1 R13.2 R21.2 | length 177.9
  Bottom Layer w1: R21.2@291.618,250.824 R2.1@288.977,250.824 284.508,250.824 283.922,250.238 283.922,203.734 284.508,203.148 351.09,203.148 352.567,204.625 352.567,255.965 351.981,256.55 350.332,256.55 JP1.3@350.267,256.615
test: H1.1 H1.2 R46.1 | length 10.6
  Bottom Layer w1: H1.1@449.124,287.705 H1.2@449.124,290.245 449.124,294.004 450.12,295 R46.1@453,295
Th: JP1.1 R1.1 R12.2 R20.2 | length 134.3
  Bottom Layer w1: R20.2@286.234,221.944 289.459,221.944 ; R12.2@289.459,226.567 289.459,221.944 ; R1.1@292.152,221.944 289.459,221.944 ; JP1.1@350.267,251.535 350.267,205.487 349.681,204.901 290.045,204.901 289.459,205.487 289.459,221.944
Tt: JP1.5 R50.1 R54.2 R58.2 | length 119.8
  Top Layer w0.6: v1(399.568,213.491) v1(399.568,218.388)
  Bottom Layer w1: JP1.5@350.267,261.695 361.975,261.695 362.561,261.109 362.561,216.356 365.426,213.491 v1(399.568,213.491) ; R50.1@396.317,226.186 391.798,226.186 391.212,225.6 R54.2@391.212,223.494 R58.2@391.212,220.979 396.978,220.979 v1(399.568,218.388)
v3: R85.2 U6.3 | length 3
  Bottom Layer w1: U6.3@425.984,235.938 R85.2@425.984,238.91
v3a: R79.2 U5.3 | length 3
  Bottom Layer w1: R79.2@386.106,286.663 U5.3@386.106,289.711
v6: R60.1 R72.2 R90.2 U6.6 | length 26
  Bottom Layer w1: R90.2@414.91,256.207 417.804,256.207 418.39,255.621 418.39,248.513 ; R60.1@415.799,248.589 418.314,248.589 418.39,248.513 ; U6.6@418.364,235.938 418.377,235.951 418.377,246.593 R72.2@418.39,246.606 418.39,248.513
v6a: R56.1 R63.2 R83.2 U5.6 | length 32.2
  Top Layer w0.6: v1(397.943,279.755) v1(405.537,279.755)
  Bottom Layer w1: R56.1@392.456,277.926 R63.2@392.456,280.669 395.02,280.669 ; U5.6@393.726,289.711 393.726,286.46 395.02,285.166 395.02,280.669 ; v1(397.943,279.755) 397.79,279.908 395.782,279.908 395.02,280.669 ; v1@405.766,279.755 407.849,279.755 409.043,278.561 R83.2@409.043,275.868
v8: Q5.3 U6.8 | length 6.5
  Bottom Layer w1: U6.8@415.799,228.293 U6.8@415.824,228.318 415.837,228.305 415.837,221.906 Q5.3@415.85,221.893
v8a: Q3.3 U5.8 | length 7.5
  Bottom Layer w1: U5.8@396.266,297.331 396.266,297.571 396.508,297.813 396.748,297.813 397.536,298.601 Q3.3@397.536,304.215
v9: Q6.1 R80.2 R89.2 U6.9 | length 19.1
  Bottom Layer w1: Q6.1@415.85,218.109 415.85,217.753 417.018,216.585 ; R89.2@417.018,211.783 417.018,216.585 ; U6.9@418.364,228.318 R80.2@418.364,222.806 418.364,217.931 417.018,216.585
v9a: Q4.1 R73.2 R82.2 U5.9 | length 22.8
  Bottom Layer w1: R82.2@388.291,304.215 Q4.1@393.726,304.215 U5.9@393.726,297.331 393.726,295.657 394.312,295.071 399.491,295.071 400.076,295.657 R73.2@400.076,297.611
pads on no net: U1.12 U5.12 U5.13 U5.14 U6.12 U6.13 U6.14 U7.12 U7.13 U7.14 U8.12 U8.13 U8.14

## Keep-outs
Keep-Out Layer:
  the board outline again, w0.1